# Altium PCB AD9854_V2.1_20130905.PcbDoc (part 2 of 3)
Units mil, origin at the board's own origin, x right, y up, seen from the top; angles counter-clockwise.
Board outline 3519.8 x 3096.6 mil, 2 copper layers (Top Layer, Bottom Layer); 99 components, 61 nets, 371 pads, 189 vias.
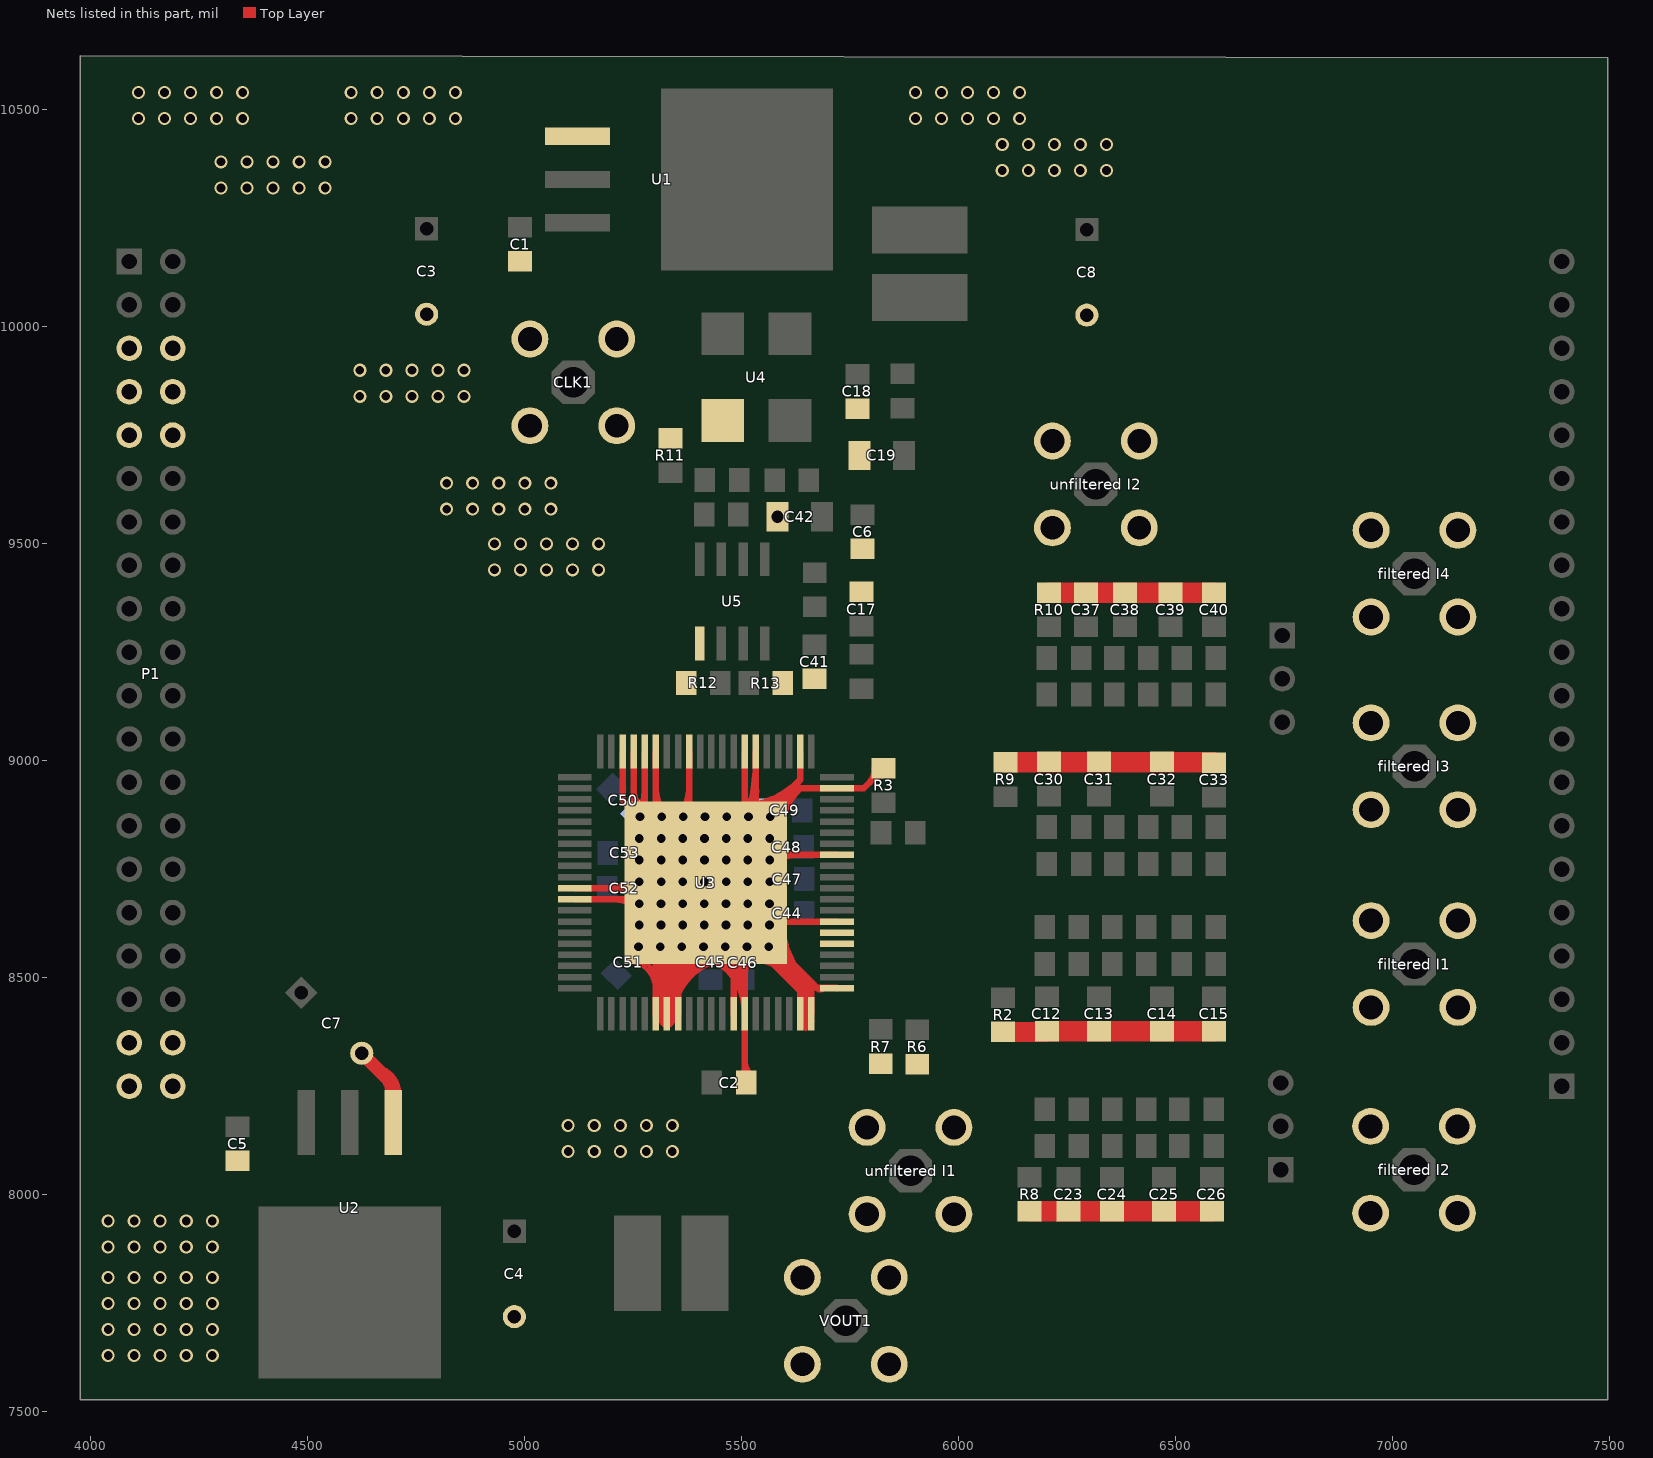
[diagram p2: the nets of this part, all layers, seen from the top]

## Via types
v1: diameter 30, hole 20, Top Layer to Bottom Layer, 120 vias
v2: diameter 40, hole 20, Top Layer to Bottom Layer, 60 vias
v3: diameter 30, hole 18, Top Layer to Bottom Layer, 5 vias
v4: diameter 100, hole 50, Top Layer to Bottom Layer, 2 vias
v5: diameter 50, hole 28, Top Layer to Bottom Layer, 1 vias
v6: diameter 25, hole 15, Top Layer to Bottom Layer, 1 vias

## Nets (pads, with @x,y where several pads share a name; then routed paths per layer and width w, separated by ;. In a path a pad name is that pad's centre, name@x,y a point inside that pad or via, vN(x,y) a via of type N, cw(c..) or ccw(c..) an arc to the next point about the centre after c; other vN are vias at no path point) (continued)
DGND: (continued)
  Top Layer w15: U3.12@5115.03,8681.11 U3.81@5378.65,8681.11 ; U3.11@5115.03,8706.7 5363.23,8706.7 cw(c5363.23,8752.25) U3.81@5324.6,8728.12 ; 5198.1,8706.7 ccw(c5198.1,8787.4) U3.81@5255.16,8730.34 ; 5207.8,8681.11 cw(c5207.8,8614.7) U3.81@5254.76,8661.66 ; 5225.01,8911.9 ccw(c5284.08,8955.04) U3.81@5267.96,8883.69 ; U3.78@5225.1,9021.5 5225.1,8911.43 U3.81@5250.69,8885.84 ; 5227.87,8909.11 cw(c5182.49,8852.84) U3.81@5253.01,8868.75 ; U3.81@5234.32,8706.7 ccw(c5234.32,8751.18) U3.81@5265.77,8719.73 ; U3.81@5240.15,8896.14 cw(c5220.95,8870.85) U3.81@5252.7,8871.32 ; U3.81@5240.35,8896.43 ccw(c5265.4,8915.45) U3.81@5265.26,8884 ; U3.81@5241.56,8885.37 ccw(c5272.79,8905.09) U3.81@5264.65,8869.06 ; U3.81@5243.58,8892.96 ccw(c5265.2,8914.58) U3.81@5265.2,8884 ; U3.81@5244.01,8681.11 cw(c5244.01,8650.91) U3.81@5265.37,8672.27 ; U3.81@5243.98,8892.55 cw(c5222.93,8871.5) U3.81@5252.7,8871.5 ; U3.81@5248.1,8706.7 ccw(c5248.1,8787.4) U3.81@5305.16,8730.34 ; U3.81@5249.12,8780.49 cw(c5295.93,8769.51) U3.81@5270.59,8810.38 ; U3.81@5249.87,8862.01 ccw(c5297.2,8872.03) U3.81@5270.82,8831.48 ; U3.81@5250.55,8786.61 ccw(c5143.47,8829.78) 5225.11,8911.42 ccw(c5306.75,8993.06) U3.81@5349.92,8885.98 ; U3.81@5250.69,8900.48 ccw(c5294.18,8900.48) U3.81@5263.43,8869.73 ; 5250.69,8936.7 ccw(c5330.4,8936.7) U3.81@5274.04,8880.34 ; U3.77@5250.69,9021.5 U3.81@5250.69,8885.84 ; U3.81@5251.72,8894.61 cw(c5232.45,8864.11) U3.81@5267.64,8872.05 ; U3.81@5252.85,8826.65 ccw(c5202.36,8852.2) U3.81@5256.13,8869.83 ; U3.81@5254.31,8838.05 cw(c5275.39,8839.46) U3.81@5268.99,8859.59 ; U3.81@5255.85,8830.48 ccw(c5229.4,8861.23) U3.81@5269.85,8858.19 ; U3.81@5256.3,8781.34 ccw(c5239.15,8803.25) U3.81@5266.77,8799.88 ; U3.81@5256.36,8880.34 ccw(c5208.26,8928.44) 5276.29,8928.44 ; U3.81@5257.8,8681.11 cw(c5257.8,8614.7) U3.81@5304.76,8661.66 ; U3.81@5261.83,8672.27 cw(c5283.19,8650.91) U3.81@5283.19,8681.11 ; U3.81@5262.23,8719.73 ccw(c5293.68,8751.18) U3.81@5293.68,8706.7 ; U3.81@5264.46,8781.01 ccw(c5166.33,8820.57) 5241.15,8895.39 ccw(c5315.97,8970.2) U3.81@5355.53,8872.07 ; U3.81@5265.2,8859 cw(c5265.2,8829.23) U3.81@5286.25,8850.28 ; U3.81@5266.97,8869.73 ccw(c5244.47,8892.23) U3.81@5276.29,8892.23 ; U3.81@5267.17,8803.19 ccw(c5299.47,8799.25) U3.81@5273.84,8779.2 ; U3.81@5267.39,8825.51 cw(c5318.47,8835.16) U3.81@5275.53,8864.46 ; U3.81@5268.75,8843.54 ccw(c5288.48,8842.06) U3.81@5273.48,8829.15 ; U3.81@5268.97,8879.71 ccw(c5285.71,8930.22) U3.81@5309.59,8882.67 ; U3.81@5272.12,8887.21 cw(c5261.26,8836.64) U3.81@5304.7,8864.71 ; U3.81@5272.25,8861.18 cw(c5301.23,8818.77) U3.81@5310.73,8869.25 ; U3.81@5272.44,8661.66 cw(c5319.4,8614.7) U3.81@5319.4,8681.11 ; U3.81@5272.84,8730.34 ccw(c5329.9,8787.4) U3.81@5329.9,8706.7 ; U3.76@5276.29,9021.5 U3.81@5276.29,8860.25 ; U3.81@5277.16,8867.86 cw(c5296.68,8861.93) U3.81@5298.03,8882.29 ; U3.81@5277.7,8871.5 ccw(c5308.28,8871.5) U3.81@5286.66,8849.88 ; U3.81@5280.66,8866.96 ccw(c5277.88,8903.55) U3.81@5305.72,8879.64 ; U3.81@5284.32,8706.7 ccw(c5284.32,8751.18) U3.81@5315.77,8719.73 ; U3.81@5289.85,8867.66 cw(c5291.64,8844.07) U3.81@5307.06,8862.02 ; U3.81@5290.11,8592.57 cw(c5261.7,8564.16) U3.81@5301.88,8564.16 ; U3.81@5291.58,8844.96 cw(c5267.62,8821) U3.81@5301.5,8821 ; U3.81@5294.01,8681.11 cw(c5294.01,8650.91) U3.81@5315.37,8672.27 ; U3.81@5295.28,8841.25 ccw(c5314,8859.98) U3.81@5314,8833.5 ; U3.81@5298.1,8706.7 ccw(c5298.1,8787.4) U3.81@5355.16,8730.34 ; U3.81@5301.13,8565.49 cw(c5262.05,8541.62) 5306.56,8530.86 ; U3.81@5301.51,8564.91 cw(c5262.35,8537.92) 5307.4,8522.69 ; U3.81@5301.58,8564.8 cw(c5283.24,8551.86) U3.81@5305.36,8548.04 ; U3.26@5301.88,8412.75 cw(c5445.44,8412.75) U3.81@5432.2,8555.7 ; U3.26@5301.88,8417.5 5301.88,8604.34 ccw(c5323.91,8604.34) U3.81@5316.18,8583.71 ; U3.26@5301.88,8429.21 cw(c5443.91,8429.21) U3.81@5430.82,8570.64 ; U3.26@5301.88,8445.66 cw(c5442.39,8445.66) U3.81@5429.43,8585.57 ; 5301.88,8462.11 cw(c5440.86,8462.11) U3.81@5428.05,8600.51 ; 5301.88,8478.56 cw(c5439.34,8478.56) U3.81@5426.67,8615.45 ; 5301.88,8495.02 cw(c5437.82,8495.02) U3.81@5425.28,8630.38 ; 5301.88,8511.47 cw(c5436.29,8511.47) U3.81@5423.9,8645.32 ; 5301.88,8517.86 cw(c5365.94,8517.86) U3.81@5320.64,8563.16 ; 5301.88,8527.92 cw(c5434.77,8527.92) U3.81@5422.52,8660.25 ; U3.81@5301.88,8544.38 cw(c5433.25,8544.38) U3.81@5421.14,8675.19 ; U3.81@5301.88,8554.08 cw(c5329.72,8554.08) U3.81@5310.03,8573.77 ; U3.81@5301.88,8560.83 cw(c5431.72,8560.83) U3.81@5419.75,8690.13 ; U3.81@5301.88,8563.52 cw(c5372.08,8563.52) 5322.44,8613.16 ccw(c5337.33,8598.27) U3.81@5316.27,8598.27 ; U3.81@5301.88,8599.73 cw(c5335.87,8599.73) U3.81@5311.83,8623.77 ; U3.81@5301.88,8832.32 cw(c5332,8832.32) U3.81@5320.13,8860.01 ; U3.81@5301.88,8844.24 ccw(c5337.24,8844.24) U3.81@5312.23,8819.23 ; U3.81@5301.88,8855.08 cw(c5322.24,8855.08) U3.81@5314.21,8873.8 ; U3.81@5301.88,8880.45 ccw(c5373.45,8880.45) U3.81@5322.84,8829.84 ; U3.81@5301.88,8897.63 ccw(c5341.33,8897.63) U3.81@5313.43,8869.73 ; 5301.88,8933.85 ccw(c5377.55,8933.85) U3.81@5324.04,8880.34 ; U3.75@5301.88,9021.5 U3.81@5301.88,8834.66 ; U3.81@5303.49,8537.26 cw(c5340.85,8530.8) U3.81@5319,8561.78 ; U3.81@5304.05,8562.19 cw(c5285.43,8538.62) 5312.78,8526.21 ; U3.81@5305.29,8612.66 cw(c5284.09,8588.82) U3.81@5312.83,8574.96 ; U3.81@5305.72,8555.59 ccw(c5313.77,8577.31) U3.81@5329.74,8560.53 ; U3.81@5306.15,8611.96 cw(c5291.24,8591.86) U3.81@5316.27,8591.86 ; U3.81@5306.77,8605.89 ccw(c5315.63,8626.78) U3.81@5330.65,8609.77 ; U3.81@5307.2,8571.17 ccw(c5258.07,8588.8) 5302.87,8615.59 cw(c5265.92,8593.68) U3.81@5307.54,8583.08 ; U3.81@5307.8,8681.11 cw(c5307.8,8614.7) U3.81@5354.76,8661.66 ; U3.81@5309.43,8584.27 ccw(c5305.1,8606.72) U3.81@5324.04,8593.91 ; U3.81@5310.93,8569.66 ccw(c5323.07,8602.42) U3.81@5347.16,8577.11 ; U3.81@5311.09,8584.48 ccw(c5308.77,8625.15) U3.81@5339.16,8598.03 ; U3.81@5311.77,8584.5 ccw(c5311.59,8652.98) U3.81@5360.14,8604.68 ; U3.81@5311.81,8569.5 ccw(c5311.72,8601.77) U3.81@5334.6,8579.01 ; U3.81@5311.83,8672.27 cw(c5333.19,8650.91) U3.81@5333.19,8681.11 ; U3.81@5311.88,8720.18 ccw(c5336.18,8735.35) U3.81@5336.18,8706.7 ; U3.81@5311.99,8598.67 cw(c5342.8,8575.15) U3.81@5358.53,8610.58 ; U3.81@5312,8600.59 cw(c5328.87,8596.29) U3.81@5319.98,8611.25 ; U3.81@5312.62,8619.7 ccw(c5325.93,8651.09) U3.81@5348.5,8625.53 ; U3.81@5313.24,8535.46 cw(c5362.58,8496.87) U3.81@5361.93,8559.5 ; U3.81@5313.32,8634.5 ccw(c5312.49,8672.52) U3.81@5339.97,8646.23 ; U3.81@5313.35,8573.96 cw(c5297.67,8554.12) U3.81@5320.7,8543.67 ; U3.81@5313.52,8619.5 ccw(c5314.55,8650.04) U3.81@5335.41,8627.71 ; U3.81@5313.86,8573.42 cw(c5293.1,8559.11) U3.81@5316.98,8551.04 ; U3.81@5314.02,8634.49 ccw(c5316.29,8701.22) U3.81@5361.87,8652.44 ; U3.81@5314,8808.5 cw(c5314,8774.62) U3.81@5337.96,8798.58 ; U3.81@5314.78,8586.43 cw(c5364.25,8544.93) U3.81@5363.71,8609.5 ; U3.81@5315.26,8623.87 cw(c5297.82,8604.26) U3.81@5321.46,8592.86 ; U3.81@5315.75,8623.28 cw(c5293.29,8609.86) U3.81@5317.92,8601.02 ; U3.81@5316.14,8583.72 ccw(c5332.37,8627.53) U3.81@5364.57,8593.69 ; U3.81@5316.27,8614.55 ccw(c5358.4,8603.26) U3.81@5322.18,8578.96 ; U3.81@5318.48,8633.51 ccw(c5336.24,8675.4) U3.81@5366.35,8641.29 ; U3.81@5322.44,8661.66 cw(c5369.4,8614.7) U3.81@5369.4,8681.11 ; U3.81@5322.65,8585.73 cw(c5309.91,8569.61) U3.81@5328.62,8561.12 ; U3.81@5323.52,8613.77 cw(c5350.72,8593) U3.81@5364.61,8624.28 ; U3.81@5323.67,8575.92 cw(c5372.84,8592.15) U3.81@5326.6,8615.44 ; U3.81@5324.07,8574.37 cw(c5360.89,8581.47) U3.81@5329.83,8602.48 ; U3.81@5324.28,8572.71 cw(c5343.87,8573.83) U3.81@5329.23,8586.89 ; U3.81@5326.1,8622.28 cw(c5348.41,8622.77) U3.81@5332.29,8638.2 ; U3.81@5326.5,8821 ccw(c5352.98,8821) U3.81@5334.25,8802.28 ; U3.81@5327.1,8875.33 ccw(c5336.35,8878.31) U3.81@5338.16,8868.77 ; U3.81@5327.93,8621.15 ccw(c5279.32,8674.07) U3.81@5351.11,8671.03 ; U3.81@5330.87,8869.06 cw(c5335.25,8833.22) U3.81@5357.5,8861.66 ; U3.81@5330.94,8575.74 ccw(c5284.93,8623.31) U3.81@5351.1,8622.21 ; U3.81@5332.46,8560.02 cw(c5362.16,8536.78) U3.81@5361.77,8574.5 ; 5332.71,8528.98 ccw(c5289.42,8570.38) U3.81@5349.3,8571.72 ; 5333.27,8520 ccw(c5304.12,8557) U3.81@5349.7,8568.85 ; U3.81@5333.38,8584.59 cw(c5335.47,8542.89) U3.81@5363.48,8573.85 ; U3.81@5334.32,8706.7 ccw(c5334.32,8751.18) U3.81@5365.77,8719.73 ; U3.81@5334.79,8545.06 cw(c5366.3,8518.43) U3.81@5362.85,8559.54 ; U3.81@5335.05,8628.87 cw(c5358.65,8610.85) U3.81@5370.7,8637.99 ; U3.81@5335.68,8611.34 cw(c5363.89,8587.68) U3.81@5363.58,8624.5 ; U3.81@5338.65,8597.16 cw(c5366.39,8572.37) U3.81@5364.3,8609.52 ; U3.81@5339.19,8870.08 ccw(c5336.26,8894.15) U3.81@5355.36,8879.2 ; U3.81@5340.99,8647.16 cw(c5365.68,8624.6) U3.81@5364.17,8658.01 ; U3.81@5341.93,8794.6 cw(c5318.83,8771.5) U3.81@5351.5,8771.5 ; U3.81@5344.01,8681.11 cw(c5344.01,8650.91) U3.81@5365.37,8672.27 ; U3.81@5344.1,8650.57 ccw(c5324.23,8668.71) U3.81@5351.11,8669.93 ; U3.81@5344.42,8792.11 ccw(c5364,8811.68) U3.81@5364,8784 ; U3.81@5344.9,8557.03 ccw(c5330.32,8569.35) U3.81@5349.34,8570.95 ; U3.81@5345.27,8604.58 ccw(c5328.01,8620) U3.81@5351.12,8621.3 ; U3.81@5346.72,8617.39 cw(c5375.86,8625.35) U3.81@5359.68,8650.86 ; U3.81@5348.64,8645.38 ccw(c5332.83,8675.03) U3.81@5366.07,8670.14 ; U3.81@5350.52,8599.09 ccw(c5334.39,8626.86) U3.81@5366.07,8621.59 ; U3.81@5350.99,8629.86 ccw(c5331.65,8660.27) U3.81@5365.98,8671.26 ; U3.81@5351.3,8534.21 ccw(c5328.37,8563.3) U3.81@5364.22,8572.63 ; U3.81@5351.79,8582.54 ccw(c5330.76,8612.57) U3.81@5366,8622.69 ; U3.28@5353.06,8417.5 5353.06,8655.52 ccw(c5376.46,8655.52) U3.81@5368.08,8633.67 ; 5353.06,8520.71 cw(c5413.09,8520.71) U3.81@5370.64,8563.16 ; U3.81@5353.06,8566.37 cw(c5419.23,8566.37) U3.81@5372.44,8613.16 ; U3.81@5353.06,8602.58 cw(c5383.02,8602.58) U3.81@5361.83,8623.77 ; U3.81@5353.06,8614.87 cw(c5419.23,8614.87) U3.81@5372.44,8661.66 ; U3.81@5353.06,8623.29 ccw(c5413.09,8623.29) U3.81@5370.64,8580.84 ; U3.81@5353.06,8651.08 cw(c5383.02,8651.08) U3.81@5361.83,8672.27 ; U3.81@5354.6,8645.65 ccw(c5330.48,8671.9) U3.81@5366.1,8670.39 ; U3.81@5355.16,8780.34 ccw(c5298.46,8837.04) U3.81@5378.65,8837.04 ; U3.81@5355.16,8829.84 ccw(c5298.46,8886.54) U3.81@5378.65,8886.54 ; U3.81@5355.23,8812.09 cw(c5300.26,8756.21) U3.81@5378.65,8756.21 ; U3.81@5356.36,8862.66 cw(c5302.56,8808.86) U3.81@5378.65,8808.86 ; U3.81@5356.36,8880.34 ccw(c5302.56,8934.14) 5378.65,8934.14 ; U3.81@5356.97,8600.92 ccw(c5336.14,8622.46) U3.81@5366.1,8621.96 ; U3.81@5359.39,8572.68 cw(c5402.08,8560.69) U3.81@5381.52,8599.97 ; U3.81@5360.93,8637.48 ccw(c5335.43,8706.47) 5402.24,8675.73 cw(c5380.37,8685.79) U3.81@5388.72,8663.2 ; U3.81@5361.19,8621.34 cw(c5396.36,8630.95) U3.81@5376.83,8661.74 ; U3.81@5361.26,8622.89 cw(c5402.09,8607.36) U3.81@5384.2,8647.21 ; U3.81@5362.12,8619.99 ccw(c5375.85,8638.62) U3.81@5383.02,8616.61 ; U3.81@5364,8759 cw(c5364,8726.33) U3.81@5387.1,8749.43 ; U3.81@5364.82,8592.58 ccw(c5341.71,8655.08) 5402.24,8627.23 cw(c5386.64,8634.4) U3.81@5392.6,8618.3 ; U3.81@5365.77,8769.73 ccw(c5334.67,8800.83) U3.81@5378.65,8800.83 ; U3.81@5365.77,8819.23 ccw(c5334.67,8850.33) U3.81@5378.65,8850.33 ; U3.81@5365.75,8822.78 cw(c5335.48,8792.01) U3.81@5378.65,8792.01 ; U3.81@5366.92,8583.4 ccw(c5374.03,8599.23) U3.81@5380.2,8583.01 ; U3.81@5366.97,8869.73 ccw(c5338.77,8897.93) U3.81@5378.65,8897.93 ; U3.81@5366.97,8873.27 cw(c5338.77,8845.07) U3.81@5378.65,8845.07 ; U3.81@5367.08,8583.33 ccw(c5393.41,8639.77) U3.81@5414.78,8581.28 ; U3.81@5367.4,8640.29 ccw(c5350.8,8666.4) U3.81@5380.27,8675.84 ; U3.81@5368.4,8547.56 ccw(c5348.61,8601.08) U3.81@5400.44,8577.23 ; U3.81@5368.46,8563.03 cw(c5384.81,8518.8) U3.81@5406.14,8560.85 ; U3.81@5368.9,8625.31 cw(c5380.67,8602.21) U3.81@5402.89,8615.56 ; U3.81@5369.01,8594.59 ccw(c5352.13,8618.71) U3.81@5380.42,8626.83 ; U3.81@5369.02,8633.26 ccw(c5379.05,8654.12) U3.81@5386.7,8632.28 ; U3.81@5369.13,8681.71 ccw(c5381.69,8707.2) U3.81@5390.83,8680.3 ; U3.81@5369.32,8548.41 ccw(c5352.61,8569.61) U3.81@5378.74,8576.4 ; U3.81@5371.02,8632.06 ccw(c5397.12,8667.49) U3.81@5410.75,8625.65 ; U3.81@5373.11,8678.61 ccw(c5395.09,8697.37) U3.81@5403.65,8669.77 ; U3.81@5373.2,8566.88 cw(c5412.43,8549.25) U3.81@5397.15,8589.45 ; U3.81@5374.53,8673.41 cw(c5382.84,8650.94) U3.81@5403.05,8663.79 ; U3.81@5374.64,8627.85 cw(c5392.89,8637.52) U3.81@5377.68,8651.48 ; U3.81@5374.81,8664.97 cw(c5403.46,8650.86) U3.81@5393.19,8681.1 ; U3.81@5374.86,8616.58 cw(c5408.4,8600.45) U3.81@5396.09,8635.57 ; U3.81@5375.35,8611.92 cw(c5390.32,8571.42) U3.81@5408.37,8610.64 ; U3.81@5376.5,8771.5 ccw(c5404.18,8771.5) U3.81@5384.61,8751.92 ; U3.72@5378.65,9021.5 U3.81@5378.65,8757.89 ; U3.81@5380.63,8660.22 cw(c5393.21,8626.19) U3.81@5408.37,8659.14 ; U3.81@5380.98,8538.86 ccw(c5359.99,8593.61) U3.81@5414.11,8571.04 ; U3.81@5383.23,8632.61 cw(c5394.49,8610.52) U3.81@5415.74,8623.29 ; U3.81@5384.27,8669.01 ccw(c5383.21,8696.47) U3.81@5404.1,8678.62 ; U3.81@5384.29,8669.02 cw(c5385.42,8640.04) U3.81@5405.11,8661.32 ; U3.81@5389.41,8579.02 cw(c5390.22,8569.87) U3.81@5399.36,8570.77 ; U3.81@5390.28,8589.2 cw(c5383.98,8575.06) U3.81@5399.37,8573.36 ; U3.81@5391.32,8557.02 cw(c5369.97,8422.07) U3.34@5506.6,8422.07 ; U3.81@5391.96,8679.85 cw(c5398.87,8661.14) U3.81@5415.71,8671.84 ; U3.81@5391.93,8744.6 cw(c5368.83,8721.5) U3.81@5401.5,8721.5 ; U3.81@5393.67,8571.84 cw(c5372.75,8439.63) U3.34@5506.6,8439.63 ; U3.81@5394.42,8742.11 ccw(c5414,8761.68) 5414,8734 ccw(c5414,8776.33) U3.81@5443.93,8746.4 ; U3.81@5394.9,8650.04 ccw(c5381.95,8685.06) U3.81@5415.87,8669.45 ; U3.81@5394.93,8567.33 ccw(c5417.73,8573.64) U3.81@5407.61,8552.26 ; U3.81@5396.01,8586.65 cw(c5375.52,8457.19) 5506.6,8457.19 ; U3.81@5396.12,8622.81 cw(c5418.14,8621.79) U3.81@5414.03,8643.45 ; U3.81@5397.52,8582.11 cw(c5419.78,8566.35) U3.81@5435.26,8588.81 ; U3.81@5397.57,8639.91 cw(c5408.31,8618.82) U3.81@5428.6,8631.01 ; U3.81@5397.97,8629.87 cw(c5421.56,8617.99) U3.81@5416.64,8643.94 ; U3.81@5398.36,8601.47 cw(c5378.3,8474.75) 5506.6,8474.75 ; U3.81@5398.78,8605.14 ccw(c5388.23,8633.67) U3.81@5415.87,8620.95 ; U3.81@5400.7,8616.28 cw(c5381.08,8492.31) 5506.6,8492.31 ; U3.81@5400.83,8633.96 cw(c5418.47,8617.44) U3.81@5431.43,8637.84 ; U3.81@5403.04,8631.1 cw(c5383.86,8509.87) 5506.6,8509.87 ; U3.81@5405.39,8645.92 cw(c5386.64,8527.43) 5506.6,8527.43 ; U3.81@5407.73,8660.73 cw(c5389.42,8544.99) U3.81@5506.6,8544.99 ; U3.81@5408.33,8598.49 cw(c5399.86,8570.14) U3.81@5429.09,8574.69 ; U3.81@5409.39,8571.33 ccw(c5459.44,8585.18) U3.81@5437.22,8538.25 ; U3.81@5409.63,8581.56 ccw(c5431.23,8630.66) U3.81@5456.02,8583.09 ; U3.81@5409.76,8573.44 cw(c5432.18,8557.58) U3.81@5447.76,8580.19 ; U3.81@5411.18,8669.85 cw(c5428.27,8674.42) U3.81@5422.13,8691.01 ; U3.81@5411.27,8621.1 ccw(c5438.99,8631.75) U3.81@5426.92,8604.62 ; U3.81@5411.27,8669.6 ccw(c5441.68,8681.28) U3.81@5428.43,8651.52 ; U3.81@5411.78,8623.71 cw(c5431.91,8604.85) U3.81@5446.7,8628.13 ; U3.81@5412.89,8733.95 ccw(c5408.95,8777.98) U3.81@5442.87,8749.63 ; U3.81@5413.56,8643.79 cw(c5407.63,8621) U3.81@5430.86,8624.89 ; U3.81@5413.58,8719.04 ccw(c5419.71,8755.19) U3.81@5447.54,8731.3 ; U3.81@5413.67,8551.39 ccw(c5404.62,8575) U3.81@5427.95,8565.26 ; U3.81@5416.09,8733.82 ccw(c5424.88,8785.7) U3.81@5464.81,8751.43 ; U3.81@5416.72,8625.54 ccw(c5431.11,8660.96) U3.81@5455.59,8631.6 ; U3.81@5417.4,8560.82 cw(c5435.67,8524.34) U3.81@5452.26,8561.62 ; U3.81@5417.39,8719.15 ccw(c5139.37,8996.69) U3.66@5532.21,8997.02 ; U3.81@5417.74,8612.1 cw(c5381.64,8551.99) U3.81@5449.67,8568.97 ; U3.81@5418.08,8610.33 cw(c5433.82,8569.34) U3.81@5451.68,8609.46 ; U3.81@5420.32,8655.99 cw(c5390.5,8599.31) U3.81@5451.66,8618.29 ; U3.81@5422,8564.78 cw(c5444.58,8548.81) U3.81@5460.27,8571.57 ; U3.81@5422.72,8613.46 cw(c5445.35,8592.26) U3.81@5461.98,8618.43 ; U3.81@5423.47,8576.48 ccw(c5475.61,8596.51) U3.81@5452.9,8545.47 ; U3.81@5425.27,8674.98 ccw(c5489.49,8699.64) U3.81@5461.52,8636.79 ; U3.81@5426.45,8722.61 cw(c5442.54,8724.05) U3.81@5430.15,8734.41 ; U3.81@5426.5,8721.5 cw(c5444.53,8721.5) U3.81@5431.78,8734.25 ; U3.81@5426.84,8707.27 cw(c5444.19,8691.51) U3.81@5457.11,8711.07 ; U3.81@5428,8708.55 ccw(c5175.62,8960.51) 5532.24,8960.81 ; U3.81@5430,8634.71 ccw(c5445.82,8669.48) U3.81@5459.22,8633.71 ; U3.81@5430.88,8586.2 cw(c5420.07,8555.79) U3.81@5450.15,8567.47 ; U3.81@5431.37,8613.07 cw(c5400.79,8575.3) U3.81@5449.32,8572.68 ; U3.81@5432.16,8660.56 cw(c5399.99,8620.83) U3.81@5451.1,8621.77 ; U3.81@5433.22,8632.37 cw(c5423.37,8601) U3.81@5452.52,8616.22 ; U3.81@5433.74,8584.91 ccw(c5447.04,8613.11) U3.81@5457.57,8583.76 ; U3.81@5433.94,8617.35 cw(c5440.62,8632.38) 5425.27,8626.48 ccw(c5486.8,8650.11) U3.81@5460,8589.89 ; U3.81@5435.02,8584.3 cw(c5422.58,8557.91) U3.81@5450.04,8567.77 ; U3.81@5435.21,8622.63 cw(c5407.77,8588.31) U3.81@5449.83,8575.61 ; U3.81@5435.43,8616.63 cw(c5459.97,8479.39) 5558.56,8577.97 cw(c5657.15,8676.56) U3.81@5519.9,8701.1 ; U3.81@5436.47,8837.31 cw(c5433.46,8794.46) U3.81@5465.89,8822.64 ; U3.81@5436.87,8631.22 ccw(c5445.1,8657.44) U3.81@5457.82,8633.08 ; U3.81@5437.42,8837.25 ccw(c5459.9,8967.05) U3.81@5553.46,8874.31 ; U3.81@5437.7,8719.01 ccw(c5384.07,8761) U3.81@5451.61,8769.87 ; U3.81@5438.07,8601.87 cw(c5466.14,8444.92) 5578.88,8557.66 cw(c5691.61,8670.4) U3.81@5534.67,8698.46 ; U3.81@5438.24,8568.97 ccw(c5449.75,8595.12) U3.81@5462.96,8569.78 ; U3.81@5438.41,8697.72 cw(c5463.79,8674.81) U3.81@5463.94,8709 ; U3.81@5438.62,8697.95 ccw(c5211.86,8924.32) 5532.27,8924.6 ; U3.81@5438.61,8720.22 cw(c5453.95,8706.29) U3.81@5465.38,8723.59 ; U3.81@5439.1,8741.57 ccw(c5409.17,8771.5) U3.81@5451.5,8771.5 ; U3.81@5439.87,8616.13 ccw(c5449.25,8639.21) U3.81@5465.2,8620.08 ; U3.81@5439.84,8745.91 cw(c5468.33,8722) U3.81@5465.09,8759.05 ; U3.81@5439.98,8852.03 ccw(c5465.89,9001.62) U3.81@5573.71,8894.74 ; U3.81@5440.32,8630.01 cw(c5431.14,8609.85) U3.81@5451.89,8617.62 ; U3.81@5440.71,8587.1 cw(c5472.3,8410.45) 5599.19,8537.34 cw(c5726.08,8664.23) U3.81@5549.43,8695.82 ; U3.81@5441.24,8582.51 ccw(c5447.9,8601.24) U3.81@5456.43,8583.29 ; U3.81@5441.53,8617.09 cw(c5442.97,8598.01) U3.81@5455.45,8612.52 ; U3.81@5442.54,8866.81 ccw(c5471.87,9036.2) 5593.96,8915.17 ; U3.81@5443.35,8572.33 cw(c5478.46,8375.99) 5619.5,8517.03 cw(c5760.55,8658.07) U3.81@5564.2,8693.18 ; U3.81@5445.1,8881.59 ccw(c5477.86,9070.77) 5614.22,8935.6 ; U3.81@5445.99,8557.57 cw(c5484.63,8341.52) 5639.82,8496.71 cw(c5795.01,8651.91) U3.81@5578.96,8690.54 ; U3.81@5446.21,8753.5 ccw(c5428.46,8768.39) U3.81@5451.55,8770.41 ; U3.81@5446.45,8580.4 ccw(c5471.68,8566.59) U3.81@5452.38,8545.26 ; U3.81@5446.46,8706.64 ccw(c5431.83,8719.85) U3.81@5451.52,8720.86 ; U3.81@5447.66,8896.37 ccw(c5483.85,9105.34) 5634.47,8956.04 ccw(c5766.08,8825.58) U3.81@5588.78,8771.7 ; U3.81@5448.42,8661.79 cw(c5469.35,8673.8) U3.81@5450.86,8689.29 ; U3.81@5448.63,8542.8 cw(c5490.79,8307.05) 5660.13,8476.4 ; U3.81@5448.78,8593.46 cw(c5431.33,8564.39) U3.81@5464.23,8572.61 ; U3.81@5449.03,8834.64 ccw(c5480.01,8946.13) 5561.84,8864.31 ccw(c5643.67,8782.48) U3.81@5532.17,8751.5 ; U3.81@5449.23,8687.35 ccw(c5248.11,8888.14) U3.81@5532.3,8888.38 ; U3.81@5449.75,8587.92 cw(c5446.73,8511.91) U3.81@5502.62,8563.52 ; U3.81@5450.23,8688.49 ccw(c5432.56,8703.98) U3.81@5453.08,8715.41 ; U3.81@5450.47,8834.64 cw(c5450.66,8757.34) U3.81@5505.18,8812.14 ; U3.81@5451.25,8753.72 cw(c5464,8740.97) U3.81@5464,8759 ; U3.81@5451.28,8557.81 ccw(c5449.48,8631.35) U3.81@5502.75,8580.62 ; U3.81@5452.37,8639.12 cw(c5439.41,8614.49) U3.81@5465.99,8622.74 ; U3.81@5452.53,8608.78 cw(c5430.64,8581.41) U3.81@5464.19,8571.28 ; U3.81@5452.96,8563.16 cw(c5385.25,8495.45) 5481.01,8495.45 ; U3.81@5453.04,8849.09 ccw(c5487.92,8974.58) 5580.02,8882.48 ccw(c5672.11,8790.38) U3.81@5546.62,8755.51 ; U3.81@5454.2,8594.59 cw(c5437,8573.34) U3.81@5464.3,8571.87 ; U3.81@5454.91,8851.22 ccw(c5446.3,8926.2) U3.81@5505.41,8879.27 ; U3.81@5455.57,8762.27 cw(c5435.11,8739.85) U3.81@5459.52,8721.8 ; U3.81@5455.77,8811.59 cw(c5435.89,8788.83) U3.81@5461.27,8772.44 ; U3.81@5457.06,8863.54 ccw(c5495.82,9003.03) 5598.19,8900.66 ccw(c5700.56,8798.29) U3.81@5561.07,8759.53 ; U3.81@5458.27,8881.01 cw(c5460.01,8813.4) U3.81@5506.59,8862.44 ; U3.81@5458.46,8782.7 ccw(c5443.37,8813.21) U3.81@5475.76,8802.77 ; U3.81@5458.61,8559.91 cw(c5440.68,8492.05) 5501.35,8527.36 ; U3.81@5459.12,8559.79 cw(c5452.24,8528.52) U3.81@5479.22,8545.77 ; U3.81@5459.2,8733.04 ccw(c5448.2,8759.48) 5474.84,8748.99 ccw(c5501.6,8738.47) U3.81@5475.39,8726.64 ; U3.81@5459.31,8572.23 ccw(c5494.6,8568.96) U3.81@5467.33,8546.32 ; U3.81@5459.61,8573.2 ccw(c5488.82,8557.21) U3.81@5466.48,8532.51 ; U3.81@5459.73,8747.14 ccw(c5433.7,8767.52) U3.81@5466.48,8771.83 ; U3.81@5459.9,8607.98 ccw(c5507.22,8643.57) U3.81@5511,8584.47 ; U3.81@5460.34,8783.45 ccw(c5439.59,8851.15) U3.81@5502.13,8817.95 ; U3.81@5460.4,8609.92 cw(c5444.1,8548.44) U3.81@5499.1,8580.38 ; U3.81@5460.76,8783.57 ccw(c5455.08,8804.74) U3.81@5474.07,8793.79 ; U3.81@5461.01,8733.64 ccw(c5444.37,8801.06) U3.81@5503.81,8765.15 ; U3.81@5461.06,8609.76 cw(c5455.87,8584.79) U3.81@5477.19,8598.78 ; U3.81@5461.12,8622.35 ccw(c5498.11,8617.13) U3.81@5469.95,8592.59 ; U3.81@5461.08,8877.99 ccw(c5503.73,9031.48) 5616.37,8918.84 ccw(c5729.01,8806.19) U3.81@5575.53,8763.54 ; U3.81@5461.39,8733.72 ccw(c5457.5,8751.95) U3.81@5473.14,8741.81 ; U3.81@5461.43,8669.26 cw(c5489.22,8685.19) U3.81@5464.67,8705.77 ; U3.81@5461.53,8620.6 ccw(c5505.57,8650.47) U3.81@5495.55,8598.21 ; U3.81@5461.76,8720.39 cw(c5490.26,8734.52) U3.81@5464.23,8752.82 ; U3.81@5461.8,8559.5 cw(c5461.8,8498.1) U3.81@5505.22,8541.52 ; U3.81@5461.81,8822.21 cw(c5497.79,8802.35) U3.81@5486.39,8841.83 ; U3.81@5461.87,8574.5 cw(c5460.79,8533.45) U3.81@5497.15,8552.55 ; U3.81@5462.26,8589.49 cw(c5461.56,8562.74) U3.81@5485.25,8575.18 ; U3.81@5462.23,8773.27 cw(c5486.88,8748.62) U3.81@5486.88,8783.48 ; U3.81@5462.44,8574.42 cw(c5453.76,8541.56) U3.81@5483.13,8558.66 ; U3.81@5462.48,8754.07 ccw(c5465.09,8784.04) U3.81@5491.65,8769.9 ; U3.81@5463.57,8573.77 cw(c5421.46,8531.66) 5481.01,8531.66 ; U3.81@5463.66,8784 ccw(c5462.19,8838.16) U3.81@5501.53,8800.9 ; U3.81@5463.78,8769.01 ccw(c5467.24,8808.6) U3.81@5502.31,8789.92 ; U3.81@5464,8784 ccw(c5464,8826.33) U3.81@5493.93,8796.4 ; U3.81@5464.14,8818.5 ccw(c5461.77,8861.29) U3.81@5500.38,8842.71 ; U3.81@5464.24,8624.42 cw(c5457.22,8597.94) U3.81@5480.91,8611.7 ; U3.81@5464.6,8719.07 ccw(c5456.64,8751.34) U3.81@5485.08,8734.15 ; U3.81@5464.73,8769.11 ccw(c5454.6,8802.19) U3.81@5485.15,8785.97 ; U3.81@5464.97,8803.53 ccw(c5463.37,8832.33) U3.81@5489.37,8819.82 ; U3.81@5465.09,8892.45 ccw(c5511.63,9059.92) 5634.55,8937.01 ; U3.81@5465.65,8822.88 cw(c5447.42,8802.03) U3.81@5470.68,8787.01 ; U3.81@5465.69,8773.35 cw(c5446.38,8752.2) U3.81@5469.41,8735.18 ; U3.81@5466.19,8892.18 cw(c5461.15,8871.22) U3.81@5482.66,8872.72 ; U3.81@5467.67,8613.26 ccw(c5525.7,8654.57) U3.81@5513.87,8584.33 ; U3.81@5469.85,8594.93 cw(c5453.51,8574.5) U3.81@5478.55,8566.94 ; U3.81@5469.85,8611.17 cw(c5479.62,8594.26) U3.81@5484.67,8613.13 ; U3.81@5470.33,8562.86 cw(c5490.24,8541.55) U3.81@5491.24,8570.7 ; U3.81@5470.94,8580.53 ccw(c5493.72,8601.82) U3.81@5492.66,8570.65 ; U3.81@5472.76,8566 ccw(c5505.96,8547.82) 5480.57,8519.76 ; U3.81@5472.84,8762.66 cw(c5523.09,8712.41) U3.81@5523.09,8783.48 ; U3.81@5473.5,8880.84 ccw(c5501.06,8911.84) U3.81@5507.31,8870.84 ; U3.81@5473.6,8796.05 ccw(c5497.11,8788.47) U3.81@5475.12,8777.2 ; U3.81@5473.94,8629.02 ccw(c5547.95,8679.21) U3.81@5531.12,8591.39 ; U3.81@5474.01,8569.32 ccw(c5501.68,8563.23) U3.81@5477.81,8547.97 ; U3.81@5474.16,8880.21 ccw(c5515.57,8920.46) U3.81@5514.75,8862.72 ; U3.81@5474.25,8570.85 ccw(c5545.59,8564.23) 5490.47,8518.46 ; U3.81@5474.43,8628.25 ccw(c5509.78,8648.66) U3.81@5499.22,8609.23 ; U3.81@5474.44,8676.72 cw(c5509.1,8696.59) U3.81@5478.48,8722.25 ; U3.81@5474.91,8863.63 cw(c5518.66,8828.14) U3.81@5512.81,8884.17 ; U3.81@5474.94,8814.96 cw(c5542.63,8777.6) U3.81@5521.18,8851.88 ; U3.81@5475.2,8727.05 cw(c5515.98,8747.28) U3.81@5478.73,8773.46 ; U3.81@5475.52,8834.18 cw(c5458.96,8815.23) U3.81@5480.09,8801.57 ; U3.81@5475.8,8784.43 cw(c5457.66,8764.55) U3.81@5479.3,8748.55 ; U3.81@5475.84,8619.46 ccw(c5509.96,8612.37) U3.81@5480.82,8593.25 ; U3.81@5475.98,8620.26 ccw(c5541.14,8611.07) U3.81@5491.53,8567.83 ; U3.81@5476.07,8774.74 cw(c5513.2,8784.7) U3.81@5479.9,8803.91 ; U3.81@5476.22,8724.11 cw(c5517.03,8732.82) U3.81@5482.02,8755.51 ; U3.81@5476.5,8771.5 cw(c5494.53,8771.5) U3.81@5481.78,8784.25 ; U3.81@5476.6,8585.76 ccw(c5509.35,8610.39) U3.81@5511.96,8569.51 ; U3.81@5478.88,8800.41 cw(c5517.77,8779.52) U3.81@5513.77,8823.49 ; U3.81@5480.14,8572.75 cw(c5480,8540.47) U3.81@5502.92,8563.2 ; U3.33@5481.01,8417.5 5481.01,8553 5461.67,8553 5477.7,8569.03 5506.6,8540.13 U3.34@5506.6,8417.5 C2.2@5506.6,8262.37 ; U3.81@5481.23,8752.96 cw(c5519.3,8729.76) U3.81@5513.69,8773.98 ; U3.81@5481.34,8867.72 ccw(c5479.05,8903.27) U3.81@5505.81,8879.75 ; U3.81@5481.52,8779.78 cw(c5534.84,8750.89) U3.81@5517.56,8809.02 ; U3.81@5482.06,8609.57 ccw(c5529.36,8636.67) U3.81@5515.08,8584.06 ; U3.81@5482.63,8875.85 cw(c5479.27,8842.07) U3.81@5505.53,8863.58 ; U3.81@5483.11,8572.74 ccw(c5483.23,8600.82) U3.81@5503,8580.88 ; U3.81@5483.12,8596.28 ccw(c5511.66,8624.98) U3.81@5511.77,8584.5 ; U3.81@5484.81,8861.66 ccw(c5486.01,8879.34) U3.81@5503.13,8874.74 ; U3.81@5485.94,8586.48 cw(c5484.35,8546.65) U3.81@5513.64,8573.7 ; U3.81@5486.39,8736.77 cw(c5528.97,8711.11) U3.81@5517.01,8759.37 ; U3.81@5486.68,8834.73 cw(c5486.78,8793.64) U3.81@5515.76,8822.77 ; U3.81@5487,8572.38 ccw(c5490.45,8583.71) U3.81@5500.84,8578.01 ; U3.81@5487.48,8558.7 ccw(c5486.57,8596.03) U3.81@5513.61,8570.28 ; U3.81@5487.59,8839.58 ccw(c5470.23,8886.3) U3.81@5517.57,8870.72 ; U3.81@5487.93,8875.32 ccw(c5490.54,8901.61) U3.81@5507.28,8881.17 ; U3.81@5488.21,8889.54 cw(c5482.77,8846.32) U3.81@5517.17,8873.03 ; U3.81@5488.67,8583.76 ccw(c5517.2,8604.06) U3.81@5511.38,8569.53 ; U3.81@5489.04,8868.21 cw(c5490.63,8843.54) U3.81@5506.95,8862.11 ; U3.81@5489.46,8791.92 ccw(c5460.38,8821) U3.81@5501.5,8821 ; U3.81@5490.89,8855.35 ccw(c5486.41,8894.36) U3.81@5517.16,8869.95 ; U3.81@5491.4,8610.63 cw(c5473.66,8574.01) U3.81@5514.3,8571.87 ; U3.81@5492.06,8824.97 cw(c5514.75,8812.79) U3.81@5512.41,8838.43 ; U3.81@5492.22,8845.4 ccw(c5487,8876.02) U3.81@5517.67,8871.1 ; U3.81@5493.31,8563.55 ccw(c5511.47,8577.21) U3.81@5512.92,8554.54 ; U3.81@5493.44,8586.01 cw(c5479.42,8571.92) U3.81@5499.3,8571.97 ; U3.81@5494.47,8881.94 cw(c5495.28,8850.53) U3.81@5516.92,8873.31 ; U3.81@5495.93,8831.25 ccw(c5515.35,8823.95) U3.81@5506.73,8805.08 ; U3.81@5496.1,8622 ccw(c5528.85,8622) U3.81@5505.69,8598.84 ; U3.81@5496.1,8622.41 ccw(c5520.07,8621.85) U3.81@5510.95,8599.68 ; U3.81@5496.51,8820.55 cw(c5527.44,8821.35) U3.81@5513.75,8849.1 ; U3.81@5497.25,8838.06 cw(c5534.86,8821.75) U3.81@5519.79,8859.87 ; U3.81@5497.35,8581.88 cw(c5518.88,8567.16) U3.81@5532.71,8589.26 ; C2.2@5498.57,8274.34 ccw(c5479.2,8293.72) 5506.6,8293.72 ; U3.81@5500.4,8802.87 cw(c5514,8789.27) U3.81@5514,8808.5 ; U3.81@5500.39,8862.18 ccw(c5522.15,8875.87) U3.81@5535.27,8853.76 ; U3.81@5501.24,8790.8 ccw(c5470.51,8804.98) U3.81@5502.27,8816.68 ; U3.81@5501.58,8846.29 ccw(c5522.04,8838.6) U3.81@5512.96,8818.73 ; U3.81@5501.89,8564.38 cw(c5479.47,8547.16) U3.81@5507.21,8541.74 ; U3.81@5502.04,8767.88 ccw(c5481.01,8761.51) U3.81@5481.01,8783.48 ; U3.81@5502.82,8815.4 cw(c5451.61,8789.74) U3.81@5505.33,8769.84 ; U3.81@5503.05,8563.08 cw(c5477.92,8537.45) 5512.4,8527.5 ; U3.81@5503.33,8852.09 ccw(c5485.57,8859.79) U3.81@5503.57,8866.91 ; U3.81@5503.41,8795.5 cw(c5527.48,8784.39) U3.81@5518.32,8809.27 ; U3.81@5503.89,8866.17 cw(c5459.82,8845.39) U3.81@5505.68,8828.92 ; U3.81@5504.55,8864.95 ccw(c5490.94,8856.59) 5492.71,8872.46 ccw(c5494.09,8884.89) U3.81@5504.64,8878.19 ; U3.81@5504.84,8797.11 ccw(c5527.05,8788.4) U3.81@5512.47,8769.52 ; U3.81@5504.91,8783.48 cw(c5504.91,8712.41) U3.81@5555.16,8762.66 ; U3.81@5505.48,8811.86 cw(c5450.95,8753.34) U3.81@5530.88,8756.16 ; U3.81@5506.32,8830.86 ccw(c5466.45,8882.03) U3.81@5530.82,8874.04 ; U3.81@5506.35,8880.33 ccw(c5443.64,8942.94) 5532.26,8943.02 ; U3.81@5506.38,8597.37 cw(c5497.92,8565.77) U3.81@5527.77,8579.16 ; U3.81@5506.57,8862.45 cw(c5482.74,8837.46) U3.81@5516.04,8828.32 ; 5506.6,8310 ccw(c5557.04,8310) C2.2@5521.37,8274.34 ; 5506.6,8502.38 cw(c5634.15,8502.38) U3.81@5543.96,8592.57 ; U3.81@5506.6,8538.6 cw(c5597.94,8538.6) U3.81@5533.35,8603.18 ; 5506.6,8922.44 ccw(c5566.14,8922.44) U3.81@5524.04,8880.34 ; U3.67@5506.6,9021.5 U3.81@5506.6,8895.03 ; U3.81@5506.74,8660.05 cw(c5456.12,8582.89) U3.81@5546.47,8601.66 ; U3.81@5506.81,8781.72 ccw(c5492.03,8802.74) U3.81@5517.34,8798.33 ; U3.81@5506.98,8781.84 ccw(c5462.69,8847.08) U3.81@5540.14,8832.27 ; U3.81@5507.12,8881.04 ccw(c5459.73,8936.98) 5532.8,8930.94 ; U3.81@5507.24,8861.33 ccw(c5528.73,8853.26) U3.81@5519.19,8832.37 ; U3.81@5507.36,8831.59 ccw(c5489.34,8860.35) U3.81@5522.42,8852.76 ; U3.81@5507.54,8659.57 cw(c5486.17,8621) U3.81@5528.56,8633.16 ; U3.81@5507.89,8545.22 cw(c5533.15,8540.28) U3.81@5518.78,8561.63 ; U3.81@5507.89,8881.64 ccw(c5478.91,8921.81) 5527.8,8913.89 ; U3.81@5508.5,8848.18 ccw(c5503.05,8880.11) U3.81@5529.48,8861.38 ; U3.81@5508.72,8882.19 ccw(c5499.07,8898.11) U3.81@5517.15,8893.68 ; U3.81@5509.32,8584.25 ccw(c5502.84,8616.26) U3.81@5530.05,8598.21 ; U3.81@5509.62,8570.78 ccw(c5540.68,8588.22) U3.81@5531.05,8553.92 ; U3.81@5509.74,8573.41 cw(c5531.78,8558.34) U3.81@5545.95,8580.98 ; U3.81@5509.99,8832.84 ccw(c5485.41,8905.41) U3.81@5554.1,8871.47 ; U3.81@5510.52,8574.14 cw(c5524.1,8551.47) U3.81@5534.56,8575.74 ; U3.81@5511,8609.77 cw(c5494.96,8534.38) U3.81@5559.61,8576.35 ; U3.81@5511.1,8622 ccw(c5580.07,8622) U3.81@5531.3,8573.23 ; U3.81@5511.1,8622.06 ccw(c5543.45,8621.31) U3.81@5531.14,8591.38 ; U3.81@5511.12,8833.16 ccw(c5501.69,8873.06) U3.81@5536.57,8851.52 ; U3.81@5511.15,8621.48 ccw(c5546.45,8628.93) U3.81@5526.76,8598.7 ; U3.81@5511.23,8569.57 ccw(c5515.9,8589.37) U3.81@5532.07,8577.02 ; U3.81@5511.5,8820.94 cw(c5553.25,8822.02) U3.81@5534.77,8859.47 ; U3.81@5511.58,8821.63 cw(c5549.13,8811.86) U3.81@5529.49,8845.32 ; U3.81@5511.73,8600.78 cw(c5498.14,8572.72) U3.81@5529.28,8571.08 ; U3.81@5511.8,8559.5 cw(c5511.8,8479.27) U3.81@5568.53,8536 ; U3.81@5511.8,8574.5 cw(c5511.8,8530.48) U3.81@5542.93,8561.61 ; U3.81@5511.81,8858.57 cw(c5537.65,8805.42) U3.81@5560.39,8859.96 ; U3.81@5512.15,8815.73 ccw(c5539.79,8804.89) U3.81@5521.64,8781.39 ; U3.81@5512.23,8773.27 cw(c5536.88,8748.62) U3.81@5536.88,8783.48 ; U3.81@5512.87,8848.92 ccw(c5508.85,8872.52) U3.81@5532.48,8868.73 ; U3.81@5512.91,8872.51 cw(c5539.14,8860.89) U3.81@5528.82,8887.65 ; U3.81@5513.08,8870.17 ccw(c5535.18,8884.07) U3.81@5548.51,8861.62 ; U3.81@5513.1,8872.86 cw(c5549.02,8849.51) U3.81@5540.13,8891.42 ; U3.81@5513.55,8573.78 cw(c5497.91,8557.84) U3.81@5519.37,8551.65 ; U3.81@5513.6,8609.5 cw(c5513.6,8577.07) U3.81@5536.53,8600 ; U3.81@5513.9,8869.36 ccw(c5526.94,8890.83) U3.81@5535.85,8867.35 ; U3.81@5514,8833.5 ccw(c5514,8874.62) U3.81@5543.08,8845.54 ; U3.81@5514.12,8624.45 cw(c5505.62,8584.47) U3.81@5539.9,8606.72 ; U3.81@5514.27,8629.93 cw(c5514.27,8572.67) U3.81@5554.76,8613.16 ; U3.81@5514.45,8818.54 ccw(c5505.63,8866.52) U3.81@5548.89,8843.97 ; U3.81@5514.49,8869.1 ccw(c5522.89,8897.64) U3.81@5538.54,8872.34 ; U3.81@5514.67,8584.17 ccw(c5521.73,8614.03) U3.81@5546.12,8595.4 ; U3.81@5514.75,8833.48 ccw(c5516.43,8861.64) U3.81@5535.15,8840.53 ; U3.81@5514.8,8818.63 ccw(c5501.84,8856.9) U3.81@5538.07,8839 ; U3.81@5514.97,8672.59 cw(c5484.22,8625.71) U3.81@5539.11,8637.11 ; U3.81@5515.15,8884 ccw(c5514.64,9000.19) 5597.15,8918.39 ; U3.81@5515.21,8869 ccw(c5514.86,8948.97) U3.81@5571.66,8892.67 ; U3.81@5515.3,8773.63 cw(c5495.61,8741.38) U3.81@5532.77,8748.28 ; U3.81@5515.28,8854 ccw(c5515.08,8897.76) U3.81@5546.16,8866.95 ; U3.81@5515.4,8769.43 ccw(c5491.45,8804.71) U3.81@5533.34,8796.7 ; U3.81@5515.54,8819.03 ccw(c5497.93,8841.63) U3.81@5526.36,8838.1 ; U3.81@5515.7,8822.83 cw(c5485.86,8790.81) U3.81@5529.61,8792.35 ; U3.81@5515.86,8873.91 cw(c5507.37,8842.77) U3.81@5538.54,8851.15 ; U3.81@5516.15,8846.35 ccw(c5539.52,8846.2) U3.81@5522.89,8829.78 ; U3.81@5516.56,8883.93 cw(c5517.77,8895.03) U3.81@5506.6,8895.03 ; U3.81@5516.8,8850.43 ccw(c5508.11,8873.83) U3.81@5531.82,8866.03 ; U3.81@5516.82,8869.59 ccw(c5492.83,8897.91) U3.81@5529.81,8894.85 ; U3.81@5516.97,8869.73 ccw(c5479.88,8906.76) 5532.29,8906.8 ; U3.81@5516.93,8873.31 cw(c5502.41,8858.09) U3.81@5522.69,8852.53 ; U3.81@5517.02,8749.89 cw(c5629.44,8784.06) U3.81@5545.99,8866.78 ; U3.81@5517.16,8803.79 ccw(c5512.68,8828.21) U3.81@5534.69,8816.73 ; U3.81@5517.26,8560.76 cw(c5531.4,8531.65) U3.81@5541.98,8562.23 ; U3.81@5517.4,8850.97 cw(c5550.03,8800.58) U3.81@5562.58,8859.28 ; U3.81@5518.08,8581.08 ccw(c5534.59,8628.39) U3.81@5556.37,8583.26 ; U3.81@5518.22,8561.28 cw(c5542.64,8520.51) U3.81@5561.45,8564.15 ; U3.81@5518.43,8804.58 ccw(c5552.58,8798.63) U3.81@5524.22,8778.69 ; U3.81@5518.73,8883.49 ccw(c5535.62,8940.88) U3.81@5567.09,8890.01 ; U3.81@5518.94,8859.57 cw(c5528.05,8830.52) U3.81@5549.58,8852.05 ; U3.81@5519.17,8690.08 ccw(c5534.79,8689.04) U3.81@5523.01,8678.73 ; U3.81@5519.33,8883.3 ccw(c5531.05,8916.82) U3.81@5546.46,8884.83 ; U3.81@5519.51,8826.65 cw(c5582.96,8784.77) U3.81@5567.71,8859.25 ; U3.81@5519.85,8871.3 ccw(c5571.46,8854.82) U3.81@5524.77,8827.34 ; 5521.05,8909.56 ccw(c5561.59,8899.61) U3.81@5525.89,8877.98 ; U3.81@5521.23,8847.57 ccw(c5546.98,8841.66) U3.81@5524.59,8827.64 ; U3.81@5521.27,8882.43 ccw(c5534.21,8905.73) U3.81@5541.54,8880.1 ; U3.81@5521.45,8568.41 ccw(c5528.55,8596.06) U3.81@5551.67,8579.33 ; U3.81@5521.64,8817.11 ccw(c5571.47,8801.36) U3.81@5525.09,8777.26 ; U3.81@5521.72,8873.92 cw(c5531.65,8845.98) U3.81@5555.25,8863.93 ; U3.81@5521.69,8882.18 ccw(c5547.15,8924.12) U3.81@5564.57,8878.25 ; U3.81@5521.88,8560.14 cw(c5551.67,8540.27) U3.81@5562.56,8574.38 ; U3.81@5522.12,8564.94 cw(c5544.69,8549.51) U3.81@5559.19,8572.69 ; U3.81@5522.44,8613.16 cw(c5562.93,8572.67) U3.81@5562.93,8629.93 ; U3.81@5522.7,8578.12 ccw(c5585.34,8613.3) U3.81@5565.92,8544.13 ; U3.81@5522.84,8762.66 cw(c5573.09,8712.41) U3.81@5573.09,8783.48 ; U3.81@5523.04,8577.46 ccw(c5548.23,8589.69) U3.81@5539.07,8563.23 ; U3.81@5523.13,8652.08 cw(c5538.76,8656.56) U3.81@5524.53,8664.44 ; U3.81@5523.24,8861.93 cw(c5531.44,8852.18) U3.81@5540.45,8861.19 ; U3.81@5524.05,8574.48 cw(c5551.2,8579.98) U3.81@5528.12,8595.29 ; U3.81@5524.36,8864.91 cw(c5536.53,8820.9) U3.81@5559.04,8860.62 ; U3.81@5524.93,8579.6 ccw(c5552.35,8607.01) U3.81@5562.45,8569.59 ; U3.81@5525.61,8588.41 ccw(c5547.32,8626.03) 5558.56,8584.07 cw(c5544.55,8635.88) 5506.6,8597.93 5634.55,8469.98 U3.39@5634.55,8417.5 ; U3.81@5525.6,8639.61 ccw(c5561.32,8661.14) U3.81@5563.75,8619.5 ; U3.81@5525.68,8864.69 cw(c5591.95,8821.59) U3.81@5575.56,8898.93 ; U3.81@5525.78,8878.16 ccw(c5548.22,8892.27) U3.81@5561.75,8869.48 ; U3.81@5525.83,8624.58 ccw(c5596.57,8639.49) U3.81@5557.09,8578.93 ; U3.81@5526.1,8817.85 cw(c5598.69,8798.96) U3.81@5560.72,8863.65 ; U3.81@5526.16,8823.88 cw(c5545,8828.33) U3.81@5528.53,8838.5 ; U3.81@5526.13,8865.43 cw(c5555.59,8849.07) U3.81@5546.33,8881.47 ; U3.81@5526.48,8820.25 cw(c5558.57,8818.33) U3.81@5537.24,8842.38 ; U3.81@5526.5,8821 cw(c5545.73,8821) U3.81@5532.13,8834.6 ; U3.81@5526.63,8866.43 cw(c5585.95,8840.13) U3.81@5562.6,8900.68 ; U3.81@5527,8867.37 cw(c5550.45,8859.17) U3.81@5539.67,8881.56 ; U3.81@5527.16,8586.73 cw(c5515.93,8550.08) U3.81@5550.52,8566.61 ; U3.81@5529.37,8857.16 cw(c5547.86,8825.44) U3.81@5560.8,8859.8 ; U3.81@5530.67,8594.85 cw(c5508.98,8559.01) U3.81@5549.66,8569.02 ; U3.81@5531.37,8754.25 cw(c5656.77,8792.36) U3.81@5563.69,8884.63 ; U3.81@5531.67,8597.39 ccw(c5576.38,8615.26) U3.81@5561,8569.63 ; U3.81@5531.83,8846.98 ccw(c5508.97,8886.57) 5553.13,8874.74 cw(c5530.91,8880.69) U3.81@5542.41,8860.77 ; U3.81@5531.97,8658.61 ccw(c5591.77,8674.18) U3.81@5562.41,8619.8 ; U3.66@5532.19,9021.5 U3.81@5532.32,8869.31 ; U3.81@5532.27,8852.94 cw(c5552.08,8833.3) U3.81@5561.14,8859.68 ; U3.81@5532.32,8874.32 ccw(c5571.62,8874.35) U3.81@5543.85,8846.53 ; U3.81@5532.51,8878.06 cw(c5535.95,8859.11) U3.81@5553.69,8866.62 ; U3.81@5532.6,8874.22 cw(c5537.97,8856.34) U3.81@5554.28,8865.42 ; U3.81@5532.93,8576.7 cw(c5557.97,8560) U3.81@5567.12,8588.67 ; U3.81@5533.62,8855.69 cw(c5552.3,8823.34) U3.81@5561.96,8859.43 ; U3.81@5534.05,8832.78 cw(c5583.46,8804.54) U3.81@5568.49,8859.44 ; U3.81@5534.28,8602.25 cw(c5554.02,8622) 5526.1,8622 ccw(c5631.28,8622) U3.81@5556.91,8547.63 ; U3.81@5537.39,8596.37 cw(c5513.15,8569.46) U3.81@5549.32,8571.35 ; U3.81@5538.42,8618.34 ccw(c5562.95,8633.12) U3.81@5564.62,8604.53 ; U3.81@5538.53,8598 cw(c5512.52,8572) U3.81@5549.3,8572 ; U3.81@5539.46,8856.88 cw(c5572.69,8834.94) U3.81@5564.7,8873.95 ; U3.81@5539.67,8810.35 ccw(c5600.32,8817.44) U3.81@5562.45,8769.54 ; U3.81@5540.01,8807.45 ccw(c5593.92,8813.76) U3.81@5562.56,8769.46 ; U3.81@5540.67,8597.23 cw(c5515.35,8574.51) U3.81@5549.32,8572.67 ; U3.81@5540.65,8625.26 ccw(c5569.4,8632.74) U3.81@5555.29,8606.6 ; U3.81@5541.07,8880.79 cw(c5548.8,8859.03) U3.81@5567.19,8873.01 ; U3.81@5541.12,8783.48 cw(c5541.12,8748.62) U3.81@5565.77,8773.27 ; U3.81@5541.15,8843.62 ccw(c5513.27,8871.5) U3.81@5552.7,8871.5 ; U3.81@5541.71,8873.1 cw(c5554.72,8846.36) U3.81@5566.16,8873.81 ; U3.81@5541.84,8579.04 cw(c5533.38,8564.39) U3.81@5549.73,8568.76 ; U3.81@5542.78,8562.93 ccw(c5547.72,8582.19) U3.81@5563.83,8570.53 ; U3.81@5543.2,8581.82 ccw(c5548.1,8597.81) U3.81@5555.94,8583.04 ; U3.81@5543.26,8561.27 ccw(c5560.14,8578.15) U3.81@5566.36,8555.11 ; U3.81@5543.73,8590.65 ccw(c5559.89,8608.59) U3.81@5561.15,8584.48 ; U3.81@5543.92,8774.02 ccw(c5567.76,8776.8) U3.81@5553.89,8757.22 ; U3.81@5543.88,8774.38 ccw(c5568.56,8777.27) U3.81@5553.15,8757.77 ; U3.81@5544.11,8617.87 cw(c5495.46,8589.78) U3.81@5549.73,8575.24 ; U3.81@5544.3,8572 ccw(c5572.71,8572) U3.81@5552.62,8551.91 ; U3.81@5544.3,8593.19 ccw(c5563.9,8610.78) U3.81@5562.48,8584.48 ; U3.81@5544.47,8569.58 ccw(c5575.5,8573.91) U3.81@5563.76,8544.87 ; U3.81@5544.85,8586.27 ccw(c5554.41,8602.07) U3.81@5558.82,8584.14 ; U3.81@5544.83,8786.95 cw(c5596.95,8783.77) U3.81@5562.34,8822.87 ; U3.81@5545.13,8591.41 ccw(c5561.8,8608.08) U3.81@5561.8,8584.5 ; U3.81@5545.72,8758.61 cw(c5684.1,8800.67) U3.81@5581.38,8902.48 ; U3.81@5545.73,8598.66 cw(c5518.94,8582.05) U3.81@5549.63,8574.85 ; U3.81@5545.94,8828.9 cw(c5596.8,8814.19) U3.81@5571.24,8860.55 ; U3.81@5546.73,8597.04 ccw(c5571.23,8612.24) U3.81@5564.65,8584.17 ; U3.81@5547.6,8603.29 cw(c5568.42,8616.62) U3.81@5551.92,8635.03 ; U3.81@5547.71,8870.88 cw(c5575.94,8871.88) U3.81@5561.59,8896.22 ; U3.81@5547.83,8869.35 cw(c5578.85,8873.19) U3.81@5564.37,8900.89 ; U3.81@5547.96,8868.52 cw(c5570.25,8872.37) U3.81@5561.77,8893.35 ; U3.81@5548.2,8875.67 cw(c5577.82,8868.4) U3.81@5566.91,8896.88 ; U3.81@5548.43,8827.77 ccw(c5503.95,8853.44) U3.81@5553.21,8867.97 ; U3.81@5548.51,8680.06 ccw(c5619.06,8683.97) U3.81@5571.94,8631.31 ; U3.81@5549.72,8698.54 ccw(c5583.61,8694.93) U3.81@5562.02,8668.57 ; U3.81@5549.88,8843.59 ccw(c5521.71,8859.85) U3.81@5553.13,8868.26 ; U3.81@5550.5,8577.35 ccw(c5494.64,8603.77) U3.81@5552.82,8624.58 ; U3.81@5550.51,8643.9 ccw(c5584.91,8645.81) U3.81@5561.93,8620.14 ; U3.81@5550.8,8577.94 ccw(c5524.33,8592.25) U3.81@5553.01,8601.36 ; U3.81@5551.53,8846.46 cw(c5575.64,8832.54) U3.81@5568.44,8859.43 ; U3.81@5553.52,8599.74 ccw(c5580.62,8608.35) U3.81@5567.55,8583.1 ; U3.81@5553.96,8587.65 cw(c5565.6,8564.4) U3.81@5588.72,8576.29 ; U3.81@5554.51,8865.01 cw(c5507.85,8836.69) U3.81@5560.2,8821.23 ; U3.81@5554.6,8630.68 ccw(c5530.9,8653.53) U3.81@5563.82,8654.13 ; U3.81@5554.61,8829.25 ccw(c5539.69,8842.38) U3.81@5559.52,8843.65 ; U3.81@5554.8,8864.57 cw(c5526.73,8845.86) U3.81@5559.8,8839.24 ; U3.81@5554.87,8630.94 ccw(c5500.38,8686.73) U3.81@5578.36,8685.81 ; U3.81@5554.83,8779.99 ccw(c5504.59,8826.5) U3.81@5573,8829.14 ; U3.81@5555.08,8780.26 ccw(c5540.94,8794.14) U3.81@5560.75,8794.32 ; U3.81@5555.34,8661.12 cw(c5506.73,8605.88) U3.81@5580.16,8610.57 ; U3.81@5555.39,8830.06 ccw(c5543.55,8842.52) U3.81@5560.73,8842.08 ; U3.81@5555.7,8660.81 cw(c5541.17,8643) U3.81@5564.04,8645.33 ; U3.81@5555.98,8811.41 cw(c5522.59,8771.52) U3.81@5574.41,8776.12 ; U3.81@5556.29,8632.14 ccw(c5539.97,8654.77) U3.81@5567.51,8650.31 ; U3.81@5556.45,8811.04 cw(c5531.98,8778.78) U3.81@5572.09,8784.29 ; U3.81@5556.6,8831.07 ccw(c5505.08,8901.16) U3.81@5591.06,8888.03 ; U3.81@5557.11,8588.44 cw(c5580.35,8603.32) U3.81@5561.93,8623.86 ; U3.81@5557.2,8812.02 ccw(c5602.39,8814.67) U3.81@5572.31,8780.84 ; U3.81@5557.22,8831.5 ccw(c5535.36,8865.38) U3.81@5574.77,8856.88 ; U3.81@5557.51,8583.74 ccw(c5550.76,8602.23) U3.81@5569.81,8607.19 ; U3.81@5557.62,8611.02 cw(c5521.29,8544.37) U3.81@5594.11,8565.81 ; U3.81@5558.16,8832.05 ccw(c5534.37,8877.13) U3.81@5583.07,8862.08 ; U3.81@5558.3,8610.68 cw(c5544.49,8581.2) U3.81@5575.1,8592.29 ; U3.81@5558.58,8858.19 ccw(c5598.98,8860.79) U3.81@5572.25,8830.39 ; U3.81@5559.32,8571.65 ccw(c5605.17,8578.06) U3.81@5587.82,8535.14 ; U3.81@5559.3,8572 ccw(c5623.92,8572) 5578.23,8526.31 ; U3.81@5559.36,8571.45 ccw(c5597.49,8580.13) U3.81@5576.67,8547.03 ; U3.81@5560.07,8762.97 cw(c5711.42,8808.97) 5599.08,8920.33 ; U3.81@5560.13,8850.07 ccw(c5584.38,8836.21) U3.81@5562,8819.5 ; U3.81@5560.18,8559.61 cw(c5552.5,8500.85) U3.81@5599.48,8536.97 ; U3.81@5560.62,8808.98 ccw(c5601.16,8809.35) U3.81@5572.76,8780.42 ; U3.81@5560.68,8574.24 cw(c5572.39,8550.85) U3.81@5595.66,8562.81 ; U3.81@5560.79,8844.17 cw(c5586.9,8838.94) U3.81@5572.13,8861.1 ; U3.81@5561.22,8600.67 cw(c5585.78,8611.73) U3.81@5561.33,8623.05 ; U3.81@5561.8,8574.5 cw(c5561.8,8540.86) U3.81@5585.59,8564.65 ; U3.81@5561.89,8883.55 ccw(c5545.66,8942.67) 5598.94,8912.34 ; U3.81@5562.27,8574.46 cw(c5553.51,8528.45) U3.81@5593.61,8552.63 ; U3.81@5562.23,8773.27 cw(c5586.88,8748.62) U3.81@5586.88,8783.48 ; U3.81@5562.66,8569.65 ccw(c5556.45,8586.66) U3.81@5573.97,8591.22 ; U3.81@5562.72,8871.19 cw(c5601.78,8876.03) 5583.55,8910.91 ; U3.81@5562.71,8871.28 cw(c5597.07,8874.27) U3.81@5576.26,8901.78 ; U3.81@5562.7,8871.41 cw(c5604.61,8872.9) 5583.31,8909.02 ; U3.81@5562.7,8871.49 cw(c5591.89,8871.62) U3.81@5571.16,8892.17 ; U3.81@5562.74,8871.07 cw(c5588.99,8875.62) U3.81@5579.01,8900.32 ; U3.81@5562.75,8872.01 cw(c5594.81,8865.38) U3.81@5576.83,8892.73 ; U3.81@5562.77,8872.1 cw(c5611.71,8860.08) 5593.68,8907.14 ; U3.81@5562.81,8859.23 cw(c5560.5,8847.35) U3.81@5572.51,8845.78 ; U3.81@5562.84,8883.78 ccw(c5556.74,8915.56) U3.81@5583.53,8897.4 ; U3.81@5563.89,8650.25 ccw(c5591.32,8650.75) U3.81@5572.28,8631 ; U3.81@5564.54,8883.98 ccw(c5562.06,8931.11) U3.81@5599.66,8902.59 ; U3.81@5564.8,8624.2 cw(c5545.8,8589.34) U3.81@5583.88,8600.55 ; U3.81@5565.04,8559.93 cw(c5569.41,8543.58) U3.81@5577.87,8558.24 ; U3.81@5565.06,8635.2 cw(c5602.25,8638.98) U3.81@5573.29,8662.6 ; U3.81@5565.12,8668.52 ccw(c5542.59,8697.9) U3.81@5579.3,8693.06 ; U3.81@5565.2,8884 ccw(c5565.2,8923.43) U3.81@5593.08,8895.55 ; U3.81@5565.25,8672.38 cw(c5540.57,8644.33) U3.81@5577.85,8646.71 ; U3.81@5565.35,8620.21 ccw(c5536.16,8650.09) U3.81@5577.93,8649.6 ; U3.81@5565.42,8560.04 cw(c5569.35,8547.08) U3.81@5581.07,8553.85 ; U3.81@5565.46,8823.03 cw(c5535.8,8781.95) U3.81@5585.82,8790.02 ; U3.81@5565.48,8818.99 ccw(c5535.41,8859.89) U3.81@5585.6,8852.23 ; U3.81@5565.67,8869.05 ccw(c5556.7,8915.55) U3.81@5597.13,8890.88 ; U3.81@5565.78,8788.91 cw(c5562.99,8761.6) U3.81@5589.65,8768.14 ; U3.81@5565.83,8769.8 ccw(c5542.17,8791.71) U3.81@5574.39,8792.95 ; U3.81@5566.16,8869.19 ccw(c5543.81,8922.9) U3.81@5599,8904.53 ; U3.81@5566.62,8573.58 cw(c5592.28,8590.01) U3.81@5571.94,8612.69 ; U3.81@5566.94,8883.88 ccw(c5569.51,8902.2) U3.81@5580.64,8887.43 ; U3.81@5567.59,8868.68 ccw(c5613.2,8855.36) U3.81@5574.25,8828.16 ; U3.81@5567.84,8652.32 ccw(c5597.12,8647.58) U3.81@5573.54,8629.58 ; U3.81@5570.11,8798.74 cw(c5589.79,8801.44) U3.81@5573.96,8813.45 ; U3.81@5571.49,8869.94 ccw(c5604.38,8851.14) U3.81@5574.02,8828.48 ; U3.81@5571.75,8842.86 ccw(c5591.34,8838.64) U3.81@5574.5,8827.78 ; U3.81@5571.92,8855.34 ccw(c5560.57,8882.63) U3.81@5588.61,8873.29 ; U3.81@5572.44,8613.16 cw(c5612.93,8572.67) 5612.93,8629.93 ; U3.81@5572.84,8762.66 cw(c5623.09,8712.41) 5623.09,8783.48 ; U3.81@5573.96,8595.44 cw(c5600.1,8604.9) U3.81@5574.92,8616.7 ; U3.81@5573.99,8574.78 ccw(c5647.42,8591.49) 5607.32,8527.75 ; U3.81@5574.17,8570.22 ccw(c5587.6,8568.28) U3.81@5580.82,8556.54 ; U3.81@5574.2,8573.61 ccw(c5619.86,8579.54) U3.81@5591.76,8543.06 ; U3.81@5574.42,8767.33 cw(c5738.75,8817.28) 5616.78,8938.19 ; U3.81@5574.71,8570.71 cw(c5625.25,8593.47) U3.81@5574.94,8616.75 ; U3.81@5575.28,8864.62 ccw(c5622.19,8845.52) U3.81@5575.52,8825.85 ; U3.81@5576.85,8876.02 cw(c5601.11,8885.44) U3.81@5580.4,8901.19 ; U3.81@5577.13,8543.5 5646.83,8473.8 ; U3.81@5577.44,8868.97 cw(c5644.96,8855.02) 5607.08,8912.63 ; U3.81@5577.48,8873.86 cw(c5604.97,8879.13) U3.81@5581.8,8894.84 ; U3.81@5577.58,8869.76 cw(c5619.03,8863.95) U3.81@5593.83,8897.37 ; U3.81@5577.65,8872.58 cw(c5628.99,8877.05) 5597.9,8918.15 ; U3.81@5577.7,8871.5 cw(c5598.62,8871.5) U3.81@5583.83,8886.3 ; U3.81@5577.7,8871.55 cw(c5643.1,8871.84) 5596.65,8917.89 ; U3.81@5578.23,8572 5662.53,8487.7 5662.53,8487.23 5672.78,8476.98 ; U3.81@5581.21,8555.33 cw(c5597.88,8572) 5574.3,8572 ccw(c5675.13,8572) 5603.83,8500.7 ; U3.81@5587.8,8548.73 ccw(c5561.8,8522.72) 5561.8,8559.5 cw(c5561.8,8489.65) 5611.19,8539.04 ; U3.81@5589.98,8767.56 cw(c5757.46,8814.1) 5634.55,8937.01 ; U3.81@5593.73,8687.9 ccw(c5829.48,8645.74) 5660.13,8476.4 ; U3.39@5634.55,8449 ccw(c5615.65,8473.8) 5646.83,8473.8 ; U3.62@5634.55,9021.5 5634.55,8956.12 U3.81@5540.45,8861.19 ; U3.39@5634.6,8401 cw(c5634.56,8388.73) 5646.83,8388.73 ; U3.39@5634.65,8416 cw(c5634.61,8403.78) 5646.83,8403.78 ; U3.39@5634.7,8431 cw(c5634.66,8418.83) 5646.83,8418.83 ; U3.39@5634.75,8446 cw(c5634.71,8433.88) 5646.83,8433.88 ; 5646.83,8385 5646.83,8473.8 ; 5646.83,8387.69 cw(c5660.14,8387.69) U3.40@5660.1,8401 ; 5646.83,8402.74 cw(c5660.1,8402.74) U3.40@5660.06,8416 ; 5646.83,8417.78 cw(c5660.05,8417.78) U3.40@5660.02,8431 ; 5646.83,8432.82 cw(c5660.01,8432.82) U3.40@5659.98,8446 ; U3.40@5660.14,8417.5 5660.14,8476.39 ; U3.40@5660.14,8449 cw(c5676.59,8473.8) 5646.83,8473.8 ; U3.41@5687.53,8476.39 cw(c5680.48,8484.67) 5672.78,8476.98 ; U3.41@5719.03,8476.39 5718.44,8476.98 5672.78,8476.98 ; U3.47@5719.03,8629.93 5506.6,8629.93 5660.14,8476.39 ; U3.53@5719.03,8783.48 U3.81@5481.01,8783.48 ; 5792.59,8948.5 ccw(c5758.35,8982.74) R3.2@5806.77,8982.74 ; 5802.09,8958 cw(c5822.9,8937.2) R3.2@5822.9,8966.62 ; R3.2@5826.83,8982.74 5781.11,8937.02 U3.59@5719.03,8937.02 5634.55,8937.02 ; U3.81@5250.7,8885.84 ccw(c5257.97,8893.12) 5261.24,8883.35 cw(c5257.97,8893.12) U3.81@5250.69,8885.84 ; U3.81@5250.7,8885.84 cw(c5243.28,8878.42) 5253.28,8875.26 ccw(c5243.28,8878.42) U3.81@5250.69,8885.84 ; U3.81@5250.69,8885.84 U3.81@5276.29,8860.25 ; U3.81@5276.29,8860.25 U3.81@5301.88,8834.66 ; U3.81@5301.88,8834.66 U3.81@5378.65,8757.89 ; U3.81@5378.65,8757.89 U3.81@5417.03,8719.5 U3.81@5481.01,8783.48 ; U3.81@5481.01,8783.48 ccw(c5491.94,8772.54) 5476.49,8771.97 cw(c5491.94,8772.54) U3.81@5481.01,8783.48 ; U3.81@5481.01,8783.48 cw(c5474.92,8789.56) 5470.47,8782.2 ccw(c5474.92,8789.56) U3.81@5481.01,8783.48 ; U3.81@5481.01,8783.48 U3.81@5549.58,8852.05 ; U3.81@5506.6,8895.03 U3.81@5532.32,8869.31 ; U3.81@5532.32,8869.31 5532.33,8853 U3.81@5540.45,8861.19 ; U3.81@5540.45,8861.19 U3.81@5549.58,8852.05 ; U3.81@5549.58,8852.05 ccw(c5538.75,8862.88) 5553.32,8867.63 cw(c5538.75,8862.88) U3.81@5549.58,8852.05 ; U3.81@5549.58,8852.05 5634.55,8937.02 ; U3.81@5550.4,8852.87 cw(c5565.2,8838.08) U3.81@5565.2,8859 ; U3.81@5550.4,8852.87 cw(c5565.2,8838.08) U3.81@5565.2,8859 ; U3.81@5550.4,8852.87 cw(c5565.2,8838.08) U3.81@5565.2,8859 ; U3.81@5460.02,8570.25 ccw(c5491.18,8600.88) 5490.8,8557.19 cw(c5491.18,8600.88) U3.81@5460.02,8570.25 ; U3.81@5470.71,8580.76 ccw(c5527.7,8636.78) 5527.02,8556.87 cw(c5527.7,8636.78) U3.81@5470.71,8580.76